# Altium PCB PoactuatorPCB4.PcbDoc (part 2 of 3)
Units mm, origin at the board's own origin, x right, y up, seen from the top; angles counter-clockwise.
Board outline 177.8 x 127 mm, 2 copper layers (Top Layer, Bottom Layer), stack 1.65 mm thick; 145 components, 104 nets, 572 pads, 279 vias.
Unrouted connection lines stored in the file: 19.
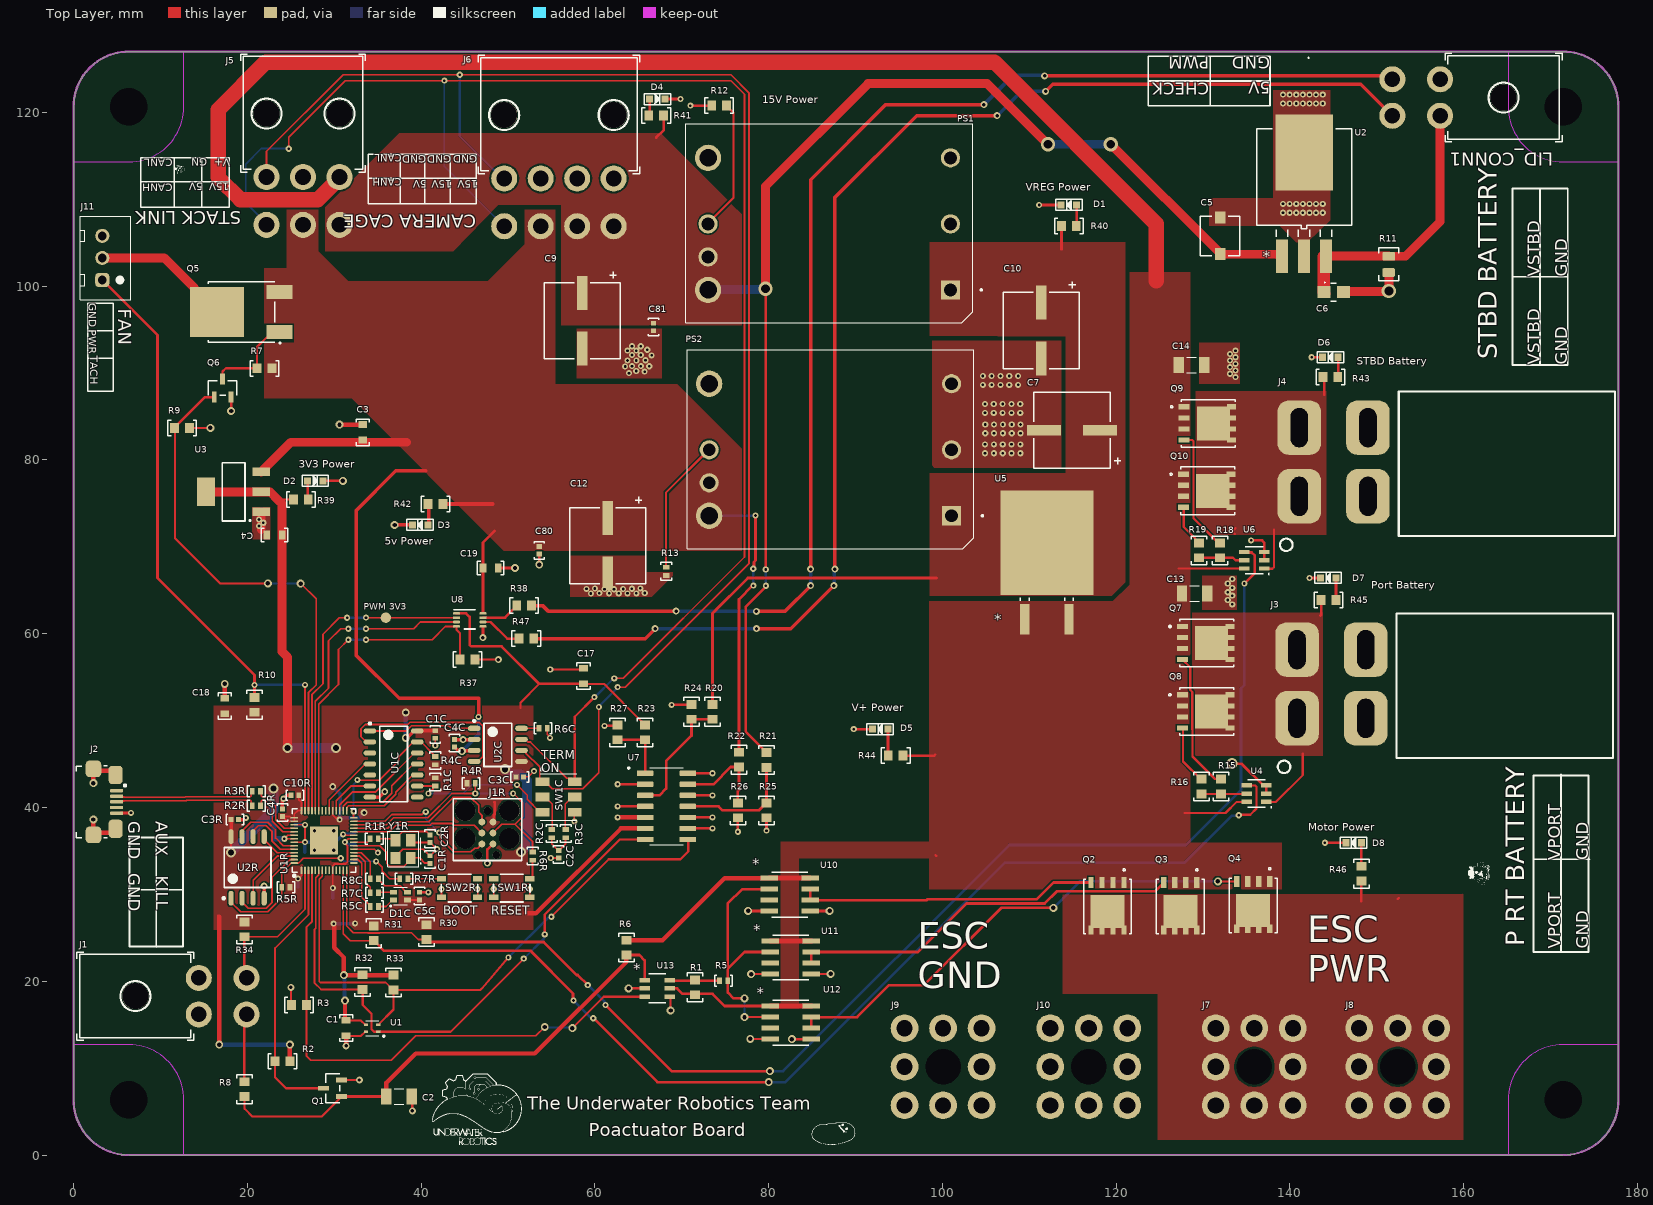
[diagram p0: Top Layer view]

## Via types
v1: diameter 0.705, hole 0.305, Top Layer to Bottom Layer, tented both sides, 119 vias
v2: diameter 0.7, hole 0.3, Top Layer to Bottom Layer, tented both sides, 51 vias
v3: diameter 0.711, hole 0.305, Top Layer to Bottom Layer, tented both sides, 35 vias
v4: diameter 0.914, hole 0.508, Top Layer to Bottom Layer, tented both sides, 35 vias
v5: diameter 0.8, hole 0.4, Top Layer to Bottom Layer, tented both sides, 28 vias
v6: diameter 1.15, hole 0.7, Top Layer to Bottom Layer, tented both sides, 6 vias
v7: diameter 1.651, hole 1.016, Top Layer to Bottom Layer, tented both sides, 4 vias
v8: diameter 1.27, hole 0.711, Top Layer to Bottom Layer, tented both sides, 1 vias

## Nets (pads, with @x,y where several pads share a name; then routed paths per layer and width w, separated by ;. In a path a pad name is that pad's centre, name@x,y a point inside that pad or via, vN(x,y) a via of type N, cw(c..) or ccw(c..) an arc to the next point about the centre after c; other vN are vias at no path point) (continued)
3V3_RP2CAN: (continued)
  Top Layer w0.508: v4(16.764,12.7) 16.764,27.432 ; R2.1@24.892,10.795 v4(24.892,12.7) ; v2@29.989,26.591 29.989,25.186 29.986,25.183 29.986,23.86 31.115,22.731 v4(31.115,20.701) R32.1@33.264,20.701 ; v4(31.242,17.78) 31.242,15.621 C1.1@31.369,15.494 ; R32.1@33.274,20.711 R33.1@36.83,20.711 ; 52.015,27.813 53.213,27.813 62.992,37.592 U7.6@65.786,37.592
  Top Layer w1.016: U3.4@15.24,76.327 U3.2@21.59,76.327 22.606,76.327 23.559,75.374 24.003,74.93 24.003,72.644 24.003,71.247 24.003,68.326 24.003,57.93 24.638,57.295 v6(24.638,46.863)
  Bottom Layer w0.254: v2(29.923,26.626) v2@29.938,26.641 ; v2@32.384,26.641 v2(32.399,26.656)
  Bottom Layer w0.4: C7R.1@25.829,30.84 v2(25.829,31.805) ; v5(29.829,42.405) 30.664,41.57 C9R.1@30.664,39.705 30.646,39.688 v2@30.646,38.805 ; C6R.1@29.845,29.572 v2(29.845,30.734) ; v2(30.629,38.605) 30.829,38.805 31.908,38.805 31.918,38.795 32.819,38.795 v5(33.429,39.405) ; v2(31.229,36.005) 31.364,36.005 31.667,35.702 C8R.1@32.394,35.702
  Bottom Layer w0.406: v2@29.938,26.641 v2@32.384,26.641
  Bottom Layer w0.508: v4(16.764,12.7) v4(24.892,12.7) ; v4(31.115,20.701) 31.178,20.637 31.178,17.843 v4(31.242,17.78) ; v4(38.227,48.016) v4(38.227,50.937)
  Bottom Layer w0.6: 22.076,38.758 23.064,37.77 C5R.1@23.064,36.405 v2(24.254,36.405)
  Bottom Layer w1.15: v6(18.124,34.805) 22.076,38.758 23.029,39.71 v6(23.029,42.205) ; v6(24.638,46.863) v6(30.226,46.863) ; v6(49.629,44.405) 50.234,43.8 51.495,43.8 52.179,43.116 52.179,35.583 v6(51.485,34.889)
5V: C3.1 C4C.1 C12.1 C19.1 C80.1 J5.5 J6.6 PS2.7 PS2.8 Q5.2 R7.1 R22.1 R42.1 U2C.3 U3.3 U8.8 | length 119.9
  Top Layer w0.254: U3.3@21.59,78.627 U3.3@22.115,78.627 ; 38.354,82.042 38.481,81.915
  Top Layer w0.305: 47.118,62.52 C19.1@47.117,67.564 47.118,70.486 48.448,71.816 ; R22.1@76.581,46.355 76.581,63.961 78.16,65.54 v3(78.24,65.54) ; v3(78.23,67.47) 78.308,67.548 78.308,68.253 78.49,68.435 v3(78.49,73.6)
  Top Layer w0.4: C4C.1@43.829,46.97 43.909,46.89 43.929,46.89 44.229,46.59 44.606,46.59 v4(44.704,46.492) 44.744,46.532 46.066,46.532 U2C.3@46.104,46.57
  Top Layer w0.406: 40.513,78.74 37.084,78.74 32.512,74.168 32.512,57.531 37.465,52.578 46.609,52.578 v3(46.609,50.429) ; R42.1@42.507,74.93 48.26,74.93
  Top Layer w1.016: U3.3@21.59,78.627 25.005,82.042 38.354,82.042
  Bottom Layer w0.254: PS2.8@73.235,73.616 73.265,73.587 78.477,73.587 v3(78.49,73.6) ; v3(78.23,67.47) 78.235,67.465 78.235,65.545 v3(78.24,65.54)
  Bottom Layer w0.4: v4(44.704,46.492) 46.609,48.397 v3(46.609,50.429)
5V_MEAS: R22.2 R26.1 U7.13 | length 10.8
  Top Layer w0.305: U7.13@70.696,42.672 73.635,42.672 75.616,44.653 R22.2@76.581,44.653 ; R26.1@76.454,40.513 76.454,41.91 76.581,42.037 R22.2@76.581,44.526
12V: C6.1 LID_CONN1.2 R11.1 U2.3 | length 31.5
  Top Layer w1.016: C6.1@143.929,99.314 143.954,99.314 C6.1@144.145,99.123 ; U2.3@143.931,103.456 R11.1@151.344,103.456 ; R11.1@151.358,103.442 R11.1@151.552,103.442 ; R11.1@151.56,103.45 153.29,103.45 157.28,107.44 LID_CONN1.2@157.28,119.61
  Top Layer w1.4: C6.1@143.891,99.314 U2.3@143.891,103.416